# Allegro board PIC1823-RCSERVO-USB2SERIAL.brd
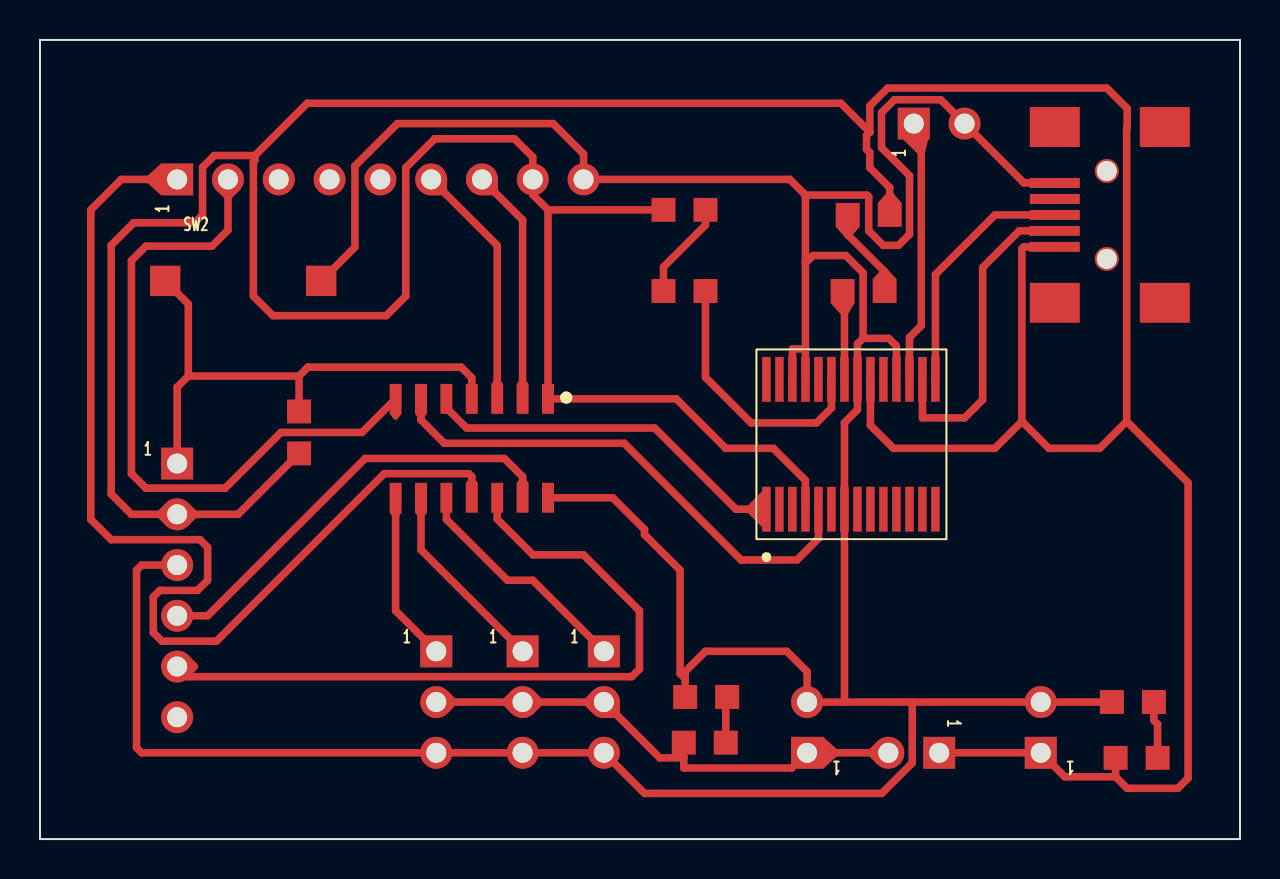
[diagram p0: board, top side]
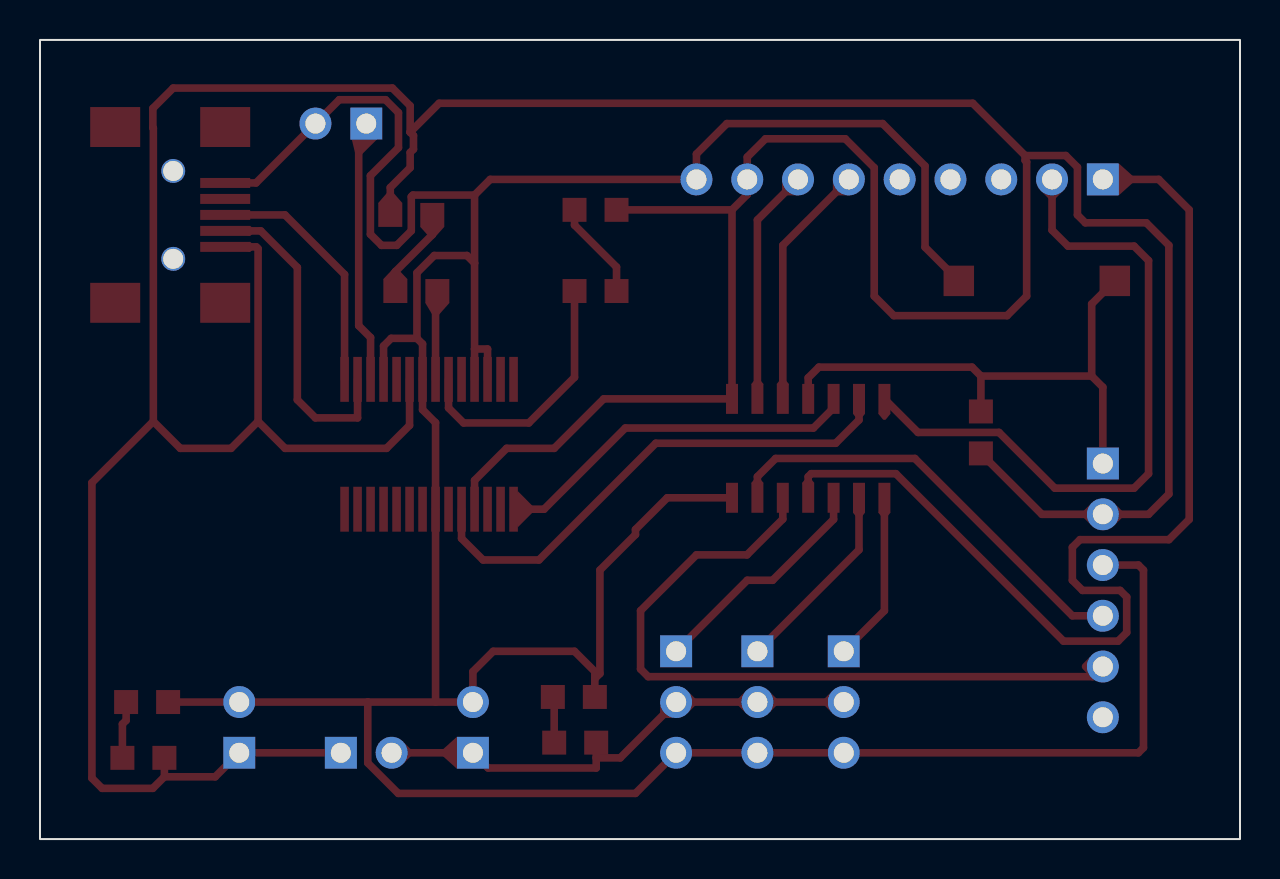
[diagram p1: board, bottom side, seen from below]

Outline 60 x 40 mm; copper layers: TOP, BOTTOM. Coordinates in mm from the lower left corner of the outline.
Outline path: rectangle 0,0 60,40

## Placement (name value [footprint] x y rotation side)
D1  5V LED  [LED_SMD_0805]  53.59 6.86 0 top
D2  6V LED  [LED_SMD_0805]  32.26 7.11 0 top
D3  TX LED  [LED_SMD_0805]  33.27 27.43 180 top
D4  RX LED  [LED_SMD_0805]  40.13 27.43 0 top
J1  6V IN  [J1_2_254]  38.35 5.59 90 top
J2  5V IN  [J1_2_254]  50.04 5.59 90 top
J3  SERVO1  [J1_3_254]  28.19 8.13 270 top
J4  SERVO2  [J1_3_254]  24.13 8.13 270 top
J5  SERVO3  [J1_3_254]  19.81 8.13 270 top
J6  ICSP  [J1_6_254]  6.86 17.53 270 top
J7  GPIO  [J1_9_254]  8.13 33.02 0 top
J8  3V3 OUT  [J1_2_254]  44.96 35.81 0 top
J9  5V_6V_JUMPER  [J1_2_254]  43.69 4.32 180 top
R1  1k  [RES_SMD_0805]  55.88 4.06 180 top
R2  1k  [RES_SMD_0805]  34.29 4.83 180 top
R10  10K  [RES_SMD_0805]  12.95 19.3 90 top
R11  330  [RES_SMD_0805]  33.27 31.5 180 top
R12  330  [RES_SMD_0805]  40.39 31.24 0 top
SW2  Reset Button  [SMD_2PIN_BUTTON]  10.16 27.94 0 top
U1  pic16f1823-SOIC14  [SOIC-14_390]  21.59 19.56 270 top
U2  FT232RL  [SSOP-28]  36.32 16.51 90 top
U3  mini USB  [MINI_USB_FP]  53.34 31.24 90 top

## Library data of the parts
D1-D4 = LED
J1 J2 J8 J9 = CON2
J3-J5 = CON3
J6 = CON6
J7 = CON9
R1 R2 R10-R12 = R
SW2 = SW_PB_SPST
U1 = pic16f1823-SOIC14_0
U2 = FT232RL
U3 = mini USB

## Footprints (pads in the part's own frame, mm; a bottom-side part is the same pattern mirrored in y, then rotated)
J1_2_254
  rect 1.6x1.6 hole 1: 1(-1.27,0)
  round 1.6 hole 1: 2(1.27,0)
J1_3_254
  rect 1.6x1.6 hole 1: 1(-1.27,0)
  round 1.6 hole 1: 2(1.27,0) 3(3.81,0)
J1_6_254
  rect 1.6x1.6 hole 1: 1(-1.27,0)
  round 1.6 hole 1: 2(1.27,0) 3(3.81,0) 4(6.35,0) 5(8.89,0) 6(11.43,0)
J1_9_254
  rect 1.6x1.6 hole 1: 1(-1.27,0)
  round 1.6 hole 1: 2(1.27,0) 3(3.81,0) 4(6.35,0) 5(8.89,0) 6(11.43,0) 7(13.97,0) 8(16.51,0) 9(19.05,0)
LED_SMD_0805
  rect 1.2x1.2 smd: 1(0,0) 2(2.1,0)
MINI_USB_FP
  rect 0.5x2.5 smd: 1(-1.6,2.6) 2(-0.8,2.6) 3(0,2.6) 4(0.8,2.6) 5(1.6,2.6)
  rect 2x2.5 smd: 6(4.4,2.6) 7(-4.4,2.6) 8(-4.4,-2.9) 9(4.4,-2.9)
  round 1.2 hole 1: 10(2.2,0) 11(-2.2,0)
RES_SMD_0805
  rect 1.2x1.2 smd: 1(0,0) 2(2.1,0)
SMD_2PIN_BUTTON
  rect 1.524x1.524 smd: 1(-3.9,0) 2(3.9,0)
SOIC-14_390
  rect 1.5x0.6 smd: 1(-2.475,3.81) 2(-2.475,2.54) 3(-2.475,1.27) 4(-2.475,0) 5(-2.475,-1.27) 6(-2.475,-2.54) 7(-2.475,-3.81) 8(2.475,-3.81) 9(2.475,-2.54) 10(2.475,-1.27) 11(2.475,0) 12(2.475,1.27) 13(2.475,2.54) 14(2.475,3.81)
SSOP-28
  rect 2.25x0.43 smd: 1(0,0) 2(0,-0.65) 3(0,-1.3) 4(0,-1.95) 5(0,-2.6) 6(0,-3.25) 7(0,-3.9) 8(0,-4.55) 9(0,-5.2) 10(0,-5.85) 11(0,-6.5) 12(0,-7.15) 13(0,-7.8) 14(0,-8.45) 15(6.5,-8.45) 16(6.5,-7.8) 17(6.5,-7.15) 18(6.5,-6.5) 19(6.5,-5.85) 20(6.5,-5.2) 21(6.5,-4.55) 22(6.5,-3.9) 23(6.5,-3.25) 24(6.5,-2.6) 25(6.5,-1.95) 26(6.5,-1.3) 27(6.5,-0.65) 28(6.5,0)

## Nets
3V3: J8.1 U2.17(3.3OUT)
5V: J2.1 J6.2 J7.8 J9.1 R1.2 R10.1 R11.2 R12.2 U1.1(VDD) U2.4(VCCIO) U2.20(VCC) U3.1(VCC)
6V: J1.1 J3.2 J4.2 J5.2 J9.2 R2.2
GND: D1.1(CATHODE) D2.1(CATHODE) J1.2 J2.2 J3.3 J4.3 J5.3 J6.3 J7.9 J8.2 SW2.2 U1.14(GND) U2.7(GND2) U2.18(GND1) U2.21(GND) U2.25(AGND) U2.26(TEST) U3.5(GND)
D+: U2.15(USBDP) U3.3(D+)
D-: U2.16(USBDM) U3.2(D-)
MCLR: J6.1 R10.2 SW2.1 U1.4(RA3/S\S\/T1G/VPP/M\C\L\R\)
PGC: J6.5 U1.12(RA1/AN1/CPS1/C12IN0-/VREF+/SRI/)
PGD: J6.4 U1.13(RA0/AN0/CPS0/C1IN+/VREF-/DACOUT)
PIC_RX: U1.5(RC5/P1A/CCP1/RX/DT/MDCIN2) U2.1(TXD)
PIC_TX: U1.6(RC4/C2OUT/SRNQ/P1B/TX/CK/MDOUT) U2.5(RXD)
RA2: J7.1 U1.11(RA2/AN2/CPS2/T0CKI/INT/C1OUT/SR)
RA4: J7.6 U1.3(RA4/AN3/CPS3/OSC2/CLKOUT/T1OSO/)
RA5: J7.7 U1.2(RA5/CLKIN/OSC1/T1OSI/T1CKI)
RC3: J7.2 U1.7(RC3/AN7/CPS7/C12IN3-/P1C/S\S\/M)
SERVO1_CTL: J3.1 U1.10(RC0/AN4/CPS4/C2IN+/SCL/SCK)
SERVO2_CTL: J4.1 U1.9(RC1/AN5/CPS5/C12IN1-/SDA/SDI)
SERVO3_CTL: J5.1 U1.8(RC2/AN6/CPS6/C12IN2-/P1D/SDO/MD)
N004430: D1.2(ANODE) R1.1
N006370: D2.2(ANODE) R2.1
N19819: D3.1(CATHODE) U2.23(CBUS0)
N19831: D4.1(CATHODE) U2.22(CBUS1)
N28451: D3.2(ANODE) R11.1
N196460: D4.2(ANODE) R12.1

Pads without a net: J6 6; J7 3 4 5; U2 2 3 6 8 9 10 11 12 13 14 19 24 27 28; U3 4 6 7 8 9 10 11

## Routing (per net, layer and track width the routed paths; a pad name or vN(x,y) marks a point on that pad's centre or on a via; arc(x,y) is an arc through that point)
3V3: length 13.2
  TOP w0.381: U2.17 43.47,25.11 44.06,25.7 44.06,35.44 J8.1
5V: length 226.3
  TOP w0.381: 49.1,20.91 50.45,19.56 52.98,19.56 54.33,20.91 ; 49.1,20.91 47.75,19.56 42.67,19.56 41.52,20.71 U2.20 ; 49.1,20.91 49.1,29.55 49.19,29.64 U3.1 ; 10.74,34.21 10.74,33.97 10.67,33.9 10.67,27.18 11.65,26.2 17.31,26.2 18.29,27.18 18.29,33.6 19.74,35.05 23.72,35.05 24.64,34.14 J7.8 24.64,32.26 25.4,31.5 ; 10.74,34.21 13.36,36.83 40.04,36.83 41.49,35.38 ; 10.74,34.21 8.71,34.21 8.13,33.63 8.13,31.24 7.73,30.85 4.69,30.85 3.56,29.72 3.56,17.27 4.57,16.26 J6.2 9.91,16.26 R10.1 ; 25.4,31.5 U1.1 31.82,22.03 34.29,19.56 36.67,19.56 38.27,17.95 U2.4 ; 25.4,31.5 R11.2 ; 41.49,35.38 41.49,36.7 42.38,37.59 53.34,37.59 54.36,36.58 54.36,35.6 54.33,35.58 54.33,20.91 ; 41.49,35.38 41.33,35.22 41.33,34.53 41.49,34.36 41.49,33.6 42.49,32.61 R12.2 ; 54.33,20.91 57.4,17.84 57.4,3.05 56.9,2.54 54.36,2.54 53.78,3.12 ; R1.2 53.78,3.12 ; 53.78,3.12 51.24,3.12 J2.1 J9.1
6V: length 25.3
  TOP w0.381: 32.19,4.06 30.99,4.06 J3.2 J4.2 J5.2 ; 32.19,4.06 32.19,3.56 37.59,3.56 J1.1 J9.2 ; 32.19,4.06 R2.2
GND: length 190.2
  TOP w0.381: 38.27,32.24 37.49,33.02 J7.9 27.18,34.29 25.65,35.81 17.87,35.81 15.75,33.69 15.75,29.63 SW2.2 ; 38.27,32.24 38.27,28.83 ; 38.27,32.24 41.35,32.24 41.44,32.15 41.44,30.45 42.16,29.72 42.92,29.72 43.48,30.27 43.48,33.2 42.08,34.61 42.08,36.36 42.72,37.01 45.03,37.01 J8.2 49.2,32.84 U3.5 ; 38.27,28.83 38.27,24.53 ; 38.27,28.83 38.65,29.21 40.29,29.21 41.15,28.34 41.15,25.06 ; U2.25 38.27,24.53 ; 38.27,24.53 37.62,24.53 U2.26 ; 41.15,25.06 42.44,25.06 42.82,24.68 U2.18 ; 41.15,25.06 40.87,24.78 U2.21 40.87,21.49 40.22,20.84 U2.7 40.22,6.86 ; 32.26,8.03 32.26,8.38 33.27,9.4 37.34,9.4 38.35,8.38 J1.2 40.22,6.86 ; 32.26,8.03 D2.1 ; 32.26,8.03 32,8.28 32,13.46 30.23,15.24 30.23,15.49 28.64,17.08 U1.14 ; 43.61,6.86 40.22,6.86 ; 43.61,6.86 J2.2 D1.1 ; 43.61,6.86 43.61,3.81 42.09,2.29 30.23,2.29 J3.3 J4.3 J5.3 5.08,4.32 4.83,4.57 4.83,13.46 5.08,13.72 J6.3
D+: length 12.5
  TOP w0.381: U3.3 47.75,31.24 44.77,28.26 U2.15
D-: length 16.3
  TOP w0.381: U3.2 48.96,30.44 47.13,28.61 47.13,21.99 46.23,21.08 44.12,21.08 U2.16
MCLR: length 27.3
  TOP w0.381: U1.4 21.59,23.09 21.06,23.62 13.4,23.62 12.95,23.18 ; SW2.1 7.42,26.78 7.42,23.18 ; R10.2 12.95,23.18 ; 12.95,23.18 7.42,23.18 ; 7.42,23.18 6.86,22.62 J6.1
PGC: length 36.5
  TOP w0.381: J6.5 7.37,8.13 29.59,8.13 29.97,8.51 29.97,11.43 27.18,14.22 24.65,14.22 22.86,16.02 U1.12
PGD: length 22
  TOP w0.381: U1.13 24.13,18.14 23.22,19.05 16.26,19.05 8.38,11.18 J6.4
PIC_RX: length 18.6
  TOP w0.381: U1.5 20.32,21.58 21.33,20.57 30.73,20.57 34.8,16.51 U2.1
PIC_TX: length 25.7
  TOP w0.381: U1.6 19.05,20.98 20.22,19.81 29.21,19.81 35.05,13.97 37.85,13.97 38.92,15.05 U2.5
RA2: length 54.1
  TOP w0.381: U1.11 21.59,18.14 21.44,18.29 17.21,18.29 8.82,9.91 6.1,9.91 5.66,10.34 5.66,12.12 5.99,12.45 7.87,12.45 8.38,12.95 8.38,14.6 8,14.99 3.56,14.99 2.54,16 2.54,31.5 4.06,33.02 J7.1
RA4: length 12.4
  TOP w0.381: J7.6 22.86,29.72 U1.3
RA5: length 11.8
  TOP w0.381: J7.7 24.13,30.99 U1.2
RC3: length 34
  TOP w0.381: J7.2 9.4,30.48 8.6,29.68 5.3,29.68 4.57,28.96 4.57,18.29 5.3,17.56 9.26,17.56 12.05,20.35 16.1,20.35 U1.7
SERVO1_CTL: length 11.7
  TOP w0.381: J3.1 24.64,12.95 23.37,12.95 20.32,16 U1.10
SERVO2_CTL: length 9.8
  TOP w0.381: U1.9 19.05,14.48 J4.1
SERVO3_CTL: length 8.5
  TOP w0.381: U1.8 17.78,11.43 J5.1
N004430: length 2.9
  TOP w0.381: R1.1 55.88,5.75 55.69,5.94 D1.2
N006370: length 2.3
  TOP w0.381: D2.2 34.29,7.04 R2.1
N19819: length 13.3
  TOP w0.381: D3.1 33.27,23.11 35.56,20.83 38.82,20.83 39.57,21.58 U2.23
N19831: length 4.5
  TOP w0.381: D4.1 40.22,27.34 U2.22
N28451: length 4.9
  TOP w0.381: R11.1 33.27,30.73 31.17,28.63 D3.2
N196460: length 4.6
  TOP w0.381: D4.2 42.23,28.4 40.39,30.25 R12.1

## Copper pours and planes (outline as drawn; the poured copper is in the pictures)
3V3 on TOP (solid shape): 44.44,35.16 44.23,34.3 44.11,34.19 43.95,34.22 43.16,35.01 43.68,35.86
6V on TOP (solid shape): 39.91,4.43 39.95,4.32 39.91,4.2 39.15,3.52 38.31,4.32 39.15,5.12
RA2 on TOP (solid shape): 6.91,33.02 6.06,32.22 5.3,32.9 5.26,33.02 5.3,33.14 6.06,33.82
5V on TOP (solid shape): 42.38,32.41 42.49,32.44 42.59,32.41 43.09,31.84 42.49,31.19 41.89,31.84
5V on TOP (solid shape): 6.91,16.26 6.29,15.69 5.86,16.12 5.81,16.26 5.86,16.39 6.29,16.82
5V on TOP (solid shape): 7.85,16.39 7.91,16.26 7.85,16.12 7.42,15.69 6.81,16.26 7.42,16.82
6V on TOP (solid shape): 20.81,6.99 20.86,6.86 20.81,6.72 20.38,6.29 19.76,6.86 20.38,7.42
6V on TOP (solid shape): 24.18,6.86 23.56,6.29 23.13,6.72 23.08,6.86 23.13,6.99 23.56,7.42
6V on TOP (solid shape): 25.13,6.99 25.18,6.86 25.13,6.72 24.7,6.29 24.08,6.86 24.7,7.42
6V on TOP (solid shape): 28.24,6.86 27.63,6.29 27.2,6.72 27.14,6.86 27.2,6.99 27.63,7.42
6V on TOP (solid shape): 42.47,4.32 41.85,3.75 41.42,4.18 41.37,4.32 41.42,4.45 41.85,4.88
PGC on TOP (solid shape): 7.85,8.77 7.91,8.64 7.85,8.5 7.42,8.07 6.81,8.64 7.42,9.2
PIC_RX on TOP (solid shape): 36.37,16.51 36.11,15.61 35.32,16.4 35.28,16.51 35.32,16.62 36.11,17.41
RC3 on TOP (solid shape): 9.96,32.45 9.53,32.02 9.4,31.97 9.26,32.02 8.83,32.45 9.4,33.07
N19831 on TOP (solid shape): 40.73,26.83 40.36,26.2 40.24,26.14 40.11,26.18 39.53,26.83 40.13,27.48
N196460 on TOP (solid shape): 42.13,28.56 42.23,28.59 42.33,28.56 42.83,28.03 42.23,27.38 41.63,28.03
N196460 on TOP (solid shape): 40.99,30.64 40.49,30.09 40.39,30.06 40.28,30.09 39.79,30.64 40.39,31.29

Small or netless copper shapes (teardrops, artwork), in the pictures only: 13 on TOP
